# Altium PCB IR Sensor.PcbDoc
Units mil, origin at the board's own origin, x right, y up, seen from the top; angles counter-clockwise.
Board outline 1900 x 635 mil, 2 copper layers (Top Layer, Bottom Layer); 9 components, 7 nets, 26 pads, 0 vias.
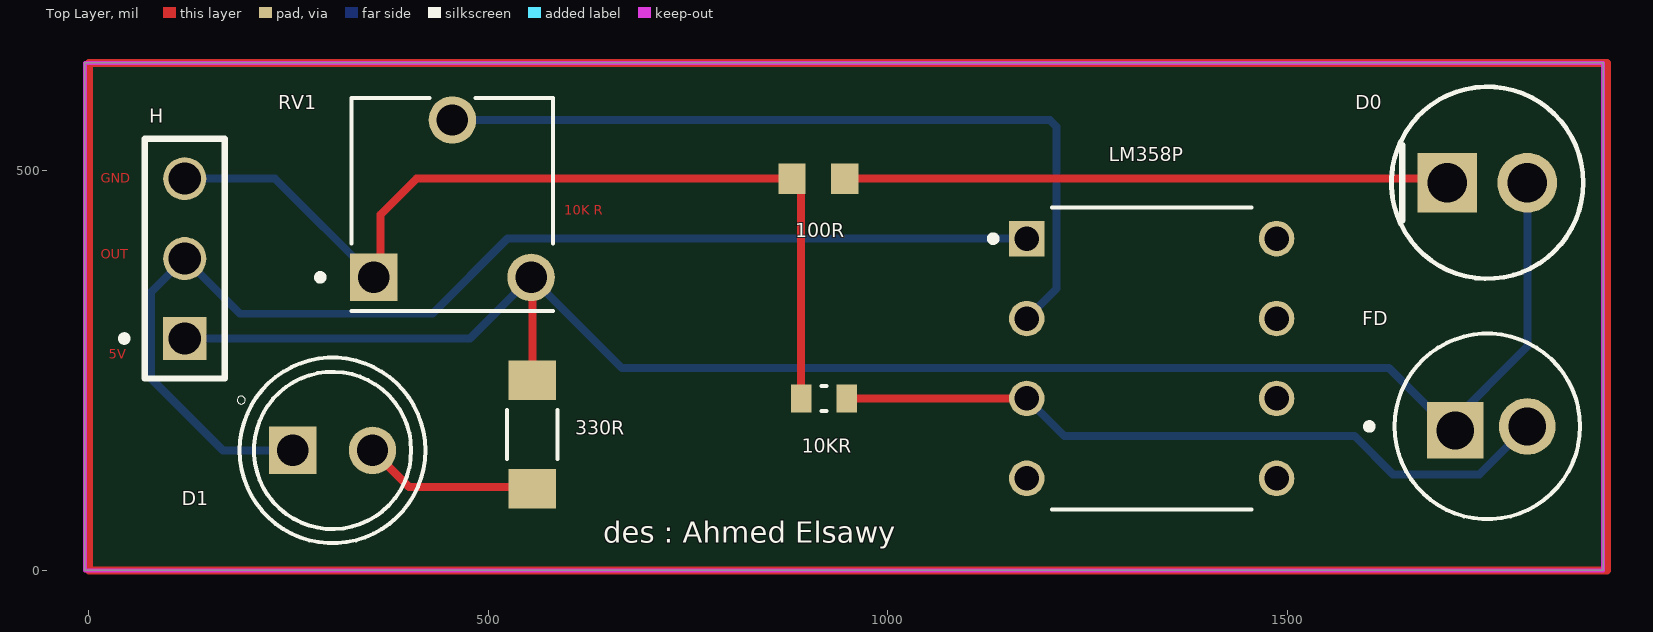
[diagram p0: Top Layer view]
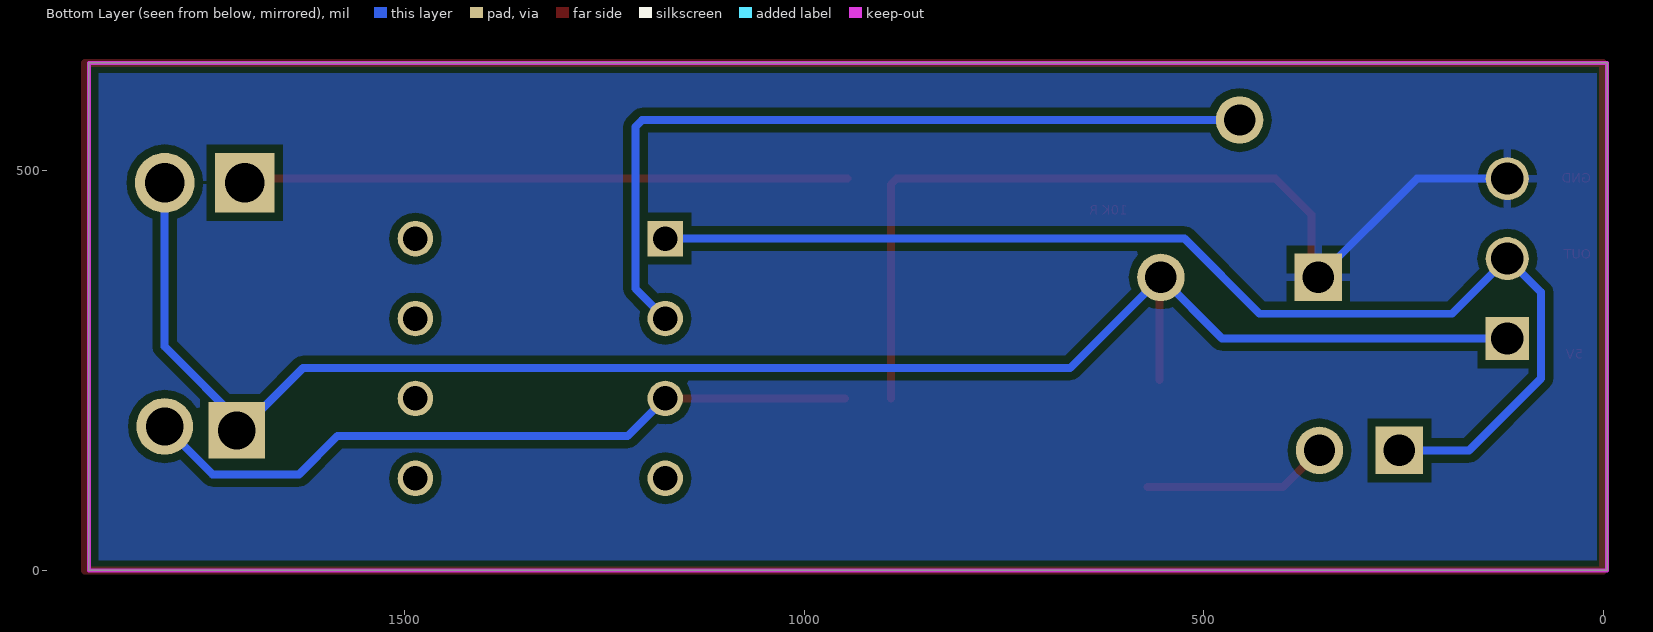
[diagram p1: Bottom Layer view, seen from below]
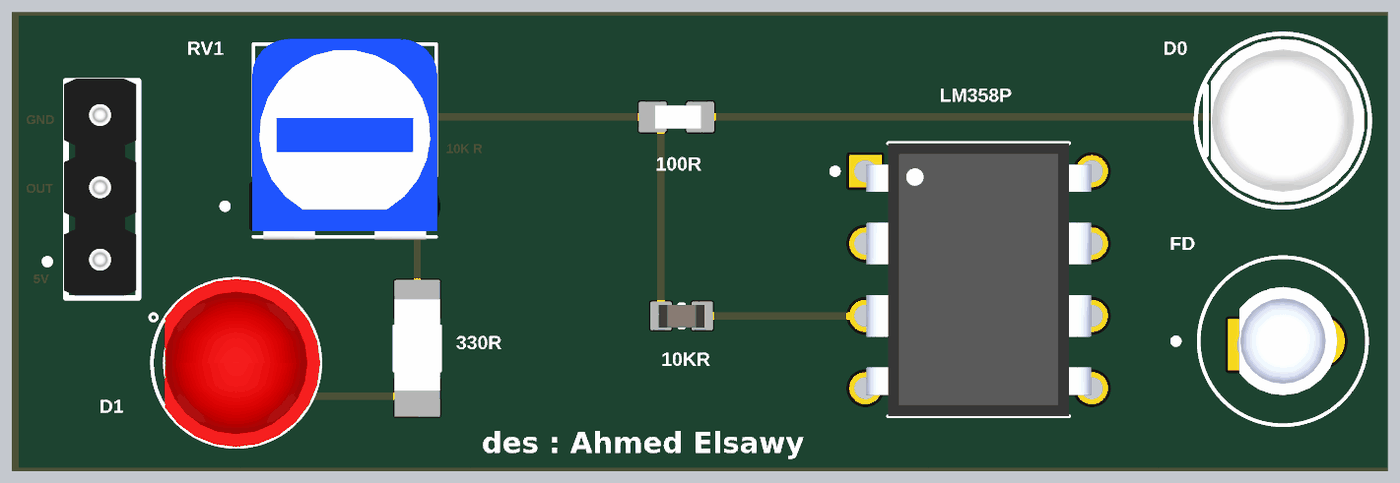
[diagram p2: 3D render of the assembled board from above, using the file's embedded part models]

## Layer stack, top to bottom
Top Solder: solder mask 0.4, Solder Resist, Dk 3.5
Top Layer: signal copper 1.4
Dielectric 1: dielectric 12.6, FR-4, Dk 4.8
Bottom Layer: signal copper 1.4
Bottom Solder: solder mask 0.4, Solder Resist, Dk 3.5

## Board outline
-5,0 -5,635 1895,635 1895,0

## Design rules (kind name [scope] priority, off if disabled: settings)
Clearance polygan_1 [InNamedPolygon('NONET_L01_P000')] p1: gap=19.68 ignorepadtopadclearanceinfootprint=FALSE
Clearance [All] p2: gap=10 ignorepadtopadclearanceinfootprint=FALSE except(0: Arc-Hole Track-Hole SMDPad-Hole THPad-Hole Via-Hole Fill-Hole Poly-Hole Region-Hole Text-Hole)
PasteMaskExpansion [All] p1: expansion=2
PolygonConnect [All] p1: connectstyle=Relief reliefconductorwidth=10 reliefentries=4 polygonreliefangle="90 Angle" airgapwidth=10
RoutingLayers [All] p1: top layer_v5=FALSE bottom layer_v5=TRUE
RoutingVias [All] p1: holewidth=28 width=50 viastyle="Through Hole" minholewidth=28 minwidth=50 maxholewidth=28 maxwidth=50
SolderMaskExpansion [All] p1: expansion=4 istentingtop=FALSE
Width [All] p1: maxlimit=10 minlimit=10 preferedwidth=10
28 further rules are at their usual default settings.

## Components (designator, comment, footprint, x,y, rotation, side; value= is the part's Value field where it differs from the comment)
10KR "ERA3ARB103V" RES_ERA3ARB103V 920,215 r0 top (schematic designator R3)
100R "100" RESC1608X55N 915,490 r0 top (schematic designator R2)
330R "ERJP08F3300V" RES_ERJP08F3300V 555,170 r90 top (schematic designator R1)
D0 "BPV10" Vishay_6.544-5185.02-4_MFG 1750,485 r0 top
D1 "WP7113ID" LED_WP7113ID 305,150 r0 top
FD "BPV10NF" XDCR_BPV10NF 1750,180 r0 top
H "TSW-101-07-T-T" SAMTEC_TSW-101-07-T-T 120,390 r0 top (schematic designator J1)
LM358P "LM358P" DIP794W45P254L959H508Q8 1330,265 r0 top (schematic designator U1)
RV1 "EVN-D8AA03B14" TRIM_EVN-D8AA03B14 455,465 r0 top

## Footprints (in the part's own frame and the unit in brackets; to place one, negate y for a bottom-side part, rotate by r counter-clockwise, add the part's x,y. Pads: shape width x height; smd on the part's side, far side on the other; paste and mask are expansions set on the pad)
DIP794W45P254L959H508Q8 [mm]
  rect 1.13x1.13 / inner round 1.13 / far side rect 1.13x1.13 hole 0.78: 1(-3.97,3.81)
  round 1.13 hole 0.78: 2(-3.97,1.27) 3(-3.97,-1.27) 4(-3.97,-3.81) 5(3.97,-3.81) 6(3.97,-1.27) 7(3.97,1.27) 8(3.97,3.81)
  silkscreen extent -5.13,-4.8 3.17,4.8, body extent -3.94,-4.79 3.94,4.79, height 5.08
LED_WP7113ID [mm]
  round 1.508 hole 1: A(1.27,0)
  rect 1.508x1.508 / inner round 1.508 / far side rect 1.508x1.508 hole 1: C(-1.27,0)
  silkscreen extent -3.03,-2.95 2.95,2.95, body extent -2.5,-2.95 2.95,2.95, height 9.6
RES_ERA3ARB103V [mm]
  rect 0.65x0.9 smd: 1(-0.725,0) 2(0.725,0)
  silkscreen extent -0.08,-0.4 0.08,0.4, body extent -0.8,-0.42 0.8,0.38, height 0.46
RES_ERJP08F3300V [mm]
  rect 1.25x1.5 smd: 1(-1.725,0) 2(1.725,0)
  silkscreen extent -0.78,-0.8 0.78,0.8, body extent -1.47,-0.8 1.73,0.8, height 0.3
RESC1608X55N [mm]
  rect 0.87x0.97 smd: 1(-0.889,0) 2(0.78,0)
  body extent -0.8,-0.4 0.8,0.4, height 0.55
SAMTEC_TSW-101-07-T-T [mm]
  rect 1.37x1.37 / inner round 1.37 / far side rect 1.37x1.37 hole 1.02: 01(0,-2.54)
  round 1.37 hole 1.02: 02(0,0) 03(0,2.54)
  silkscreen extent -2.02,-3.81 1.27,3.81, body extent -1.34,-3.74 1.2,3.88, height 7.44
TRIM_EVN-D8AA03B14 [mm]
  rect 1.508x1.508 / inner round 1.508 / far side rect 1.508x1.508 hole 1: 1(-2.5,-2.5)
  round 1.508 hole 1: 2(0,2.5) 3(2.5,-2.5)
  silkscreen extent -4.3,-3.57 3.2,3.2, body extent -1272.54,-1272.54 3.25,3.37, height 1.27
Vishay_6.544-5185.02-4_MFG [mm]
  rect 1.9x1.9 hole 1.25 paste-1000 mask+0: 1(-1.27,0)
  round 1.9 hole 1.25 paste-1000 mask+0: 2(1.27,0)
  silkscreen extent -3.05,-3.05 3.05,3.05, body extent -3.05,-3.05 3.05,3.05, height 0.25
XDCR_BPV10NF [mm]
  round 1.8 hole 1.2: A(1.27,0)
  rect 1.8x1.8 / inner round 1.8 / far side rect 1.8x1.8 hole 1.2: C(-1.016,-0.127)
  silkscreen extent -3.85,-2.95 2.95,2.95, body extent -1.52,-1.89 1.91,1.91, height 5.4

## Part data
10KR 330R H: Package=None, Availability=Unavailable, Price=None
  10KR: MP=ERA3ARB103V
  330R: MP=ERJP08F3300V
  H: MF=Samtec, MP=TSW-101-07-T-T
100R: library part CRGH0603J100R, "CRGH0603 5% 100R 0.2W", Package=None, Availability=Unavailable, MP=CRGH0603J100R, Price=None
D1: "Red 617nm LED Indication - Discrete 2V Radial", Package="Radial Kingbright", Availability="In Stock", Check_prices=https://www.snapeda.com/parts/WP7113ID/Kingbright/view-part/?ref=eda, MF=Kingbright, MP=WP7113ID, Price=None, Purchase-URL=https://pricing.snapeda.com/search/part/WP7113ID/?ref=eda, SnapEDA_Link=https://www.snapeda.com/parts/WP7113ID/Kingbright/view-part/?ref=snap
FD: "Photodiodes T-1.75 790 to 1050nm +/-20 deg", Package=None, Availability="In Stock", Check_prices=https://www.snapeda.com/parts/BPV10NF/Vishay/view-part/?ref=eda, MF="Vishay Semiconductors", MP=BPV10NF, Price=None, Purchase-URL=https://pricing.snapeda.com/search/part/BPV10NF/?ref=eda, SnapEDA_Link=https://www.snapeda.com/parts/BPV10NF/Vishay/view-part/?ref=snap
LM358P: "Dual, 30-V, 700-kHz operational amplifier", Package="PDIP-8 Texas", Availability="In Stock", Check_prices=https://www.snapeda.com/parts/LM358P/Texas+Instruments/view-part/?ref=eda, MF="Texas Instruments", MP=LM358P, Price=None, Purchase-URL=https://pricing.snapeda.com/search/part/LM358P/?ref=eda, SnapEDA_Link=https://www.snapeda.com/parts/LM358P/Texas+Instruments/view-part/?ref=snap
RV1: "10 kOhms 0.1W, 1/10W PC Pins Through Hole Trimmer Potentiometer Carbon 1.0 Turn Top Adjustment", Package="PQFP-44 Panasonic", Availability="In Stock", Check_prices=https://www.snapeda.com/parts/EVN-D8AA03B14/Panasonic+Electronic+Components/view-part/?ref=eda, MF="Panasonic Electronic", MP=EVN-D8AA03B14, Price=None, Purchase-URL=https://pricing.snapeda.com/search/part/EVN-D8AA03B14/?ref=eda, SnapEDA_Link=https://www.snapeda.com/parts/EVN-D8AA03B14/Panasonic+Electronic+Components/view-part/?ref=snap

## Nets (pads, with @x,y where several pads share a name; then routed paths per layer and width w, separated by ;. In a path a pad name is that pad's centre, name@x,y a point inside that pad or via, vN(x,y) a via of type N, cw(c..) or ccw(c..) an arc to the next point about the centre after c; other vN are vias at no path point)
+5: 330R.2 D0.2 FD.C H.01 RV1.3 | length 2164.7
  Top Layer w10: RV1.3 555,365 330R.2
  Bottom Layer w10: H.01 476.85,290 RV1.3 667,253 1627,253 1700,180 1800,280 D0.2
GND: 10KR.1 100R.1 H.03 RV1.1 | length 1185.5
  Top Layer w10: RV1.1 365,375 365,445 410,490 884.29,490 891.46,482.84 10KR.1
  Bottom Layer w10: H.03 233.15,490 RV1.1
NetD0_1: 100R.2 D0.1 | length 756.4
  Top Layer w10: 100R.2 1695,490 D0.1
NetD1_A: 330R.1 D1.A | length 234
  Top Layer w10: D1.A 400.83,104.17 330R.1@570,104.17
NetFD_A: 10KR.2 FD.A LM358P.3 | length 915.7
  Top Layer w10: 10KR.2 LM358P.3
  Bottom Layer w10: LM358P.3 1220.7,168 1584,168 1632,120 1740,120 FD.A
NetLM358P_2: LM358P.2 RV1.2 | length 1014.9
  Bottom Layer w10: RV1.2 1202.57,563.43 1211,555 1211,352.3 LM358P.2
out1: D1.C H.02 LM358P.1 | length 1502.9
  Bottom Layer w10: D1.C 168,150 78,240 78,348 H.02 189,321 430,321 524,415 LM358P.1
pads on no net: LM358P.4 LM358P.5 LM358P.6 LM358P.7 LM358P.8
copper on no net: | length 5070
  Top Layer w10: 0,0 1900,0 1900,635 0,635 0,0

## Polygon pours and split planes (outlines as drawn)
GND on Bottom Layer "GND_L02_P000" (solid, remove dead copper, pour order 0): -5,0 -5,635 1895,635 1895,0

## Keep-outs
Keep-Out Layer:
  the board outline again, w5

## Other copper
Top Layer:
  text "GND" at 15,480.23 h20
  text "10K R" at 595,440.23 h20
  text "OUT" at 15,385.23 h20
  text "5V" at 25,260.23 h20

## Silkscreen, mask and mechanical layers (free items; w line width, h text height)
Top Overlay:
  text "des : Ahmed Elsawy" at 643.94,25.65 h45